# Altium PCB motordriver-v3.1.PcbDoc
Units mil, origin at the board's own origin, x right, y up, seen from the top; angles counter-clockwise.
Board outline 3310 x 2010 mil, 2 copper layers (Top Layer, Bottom Layer); 84 components, 64 nets, 279 pads, 243 vias.
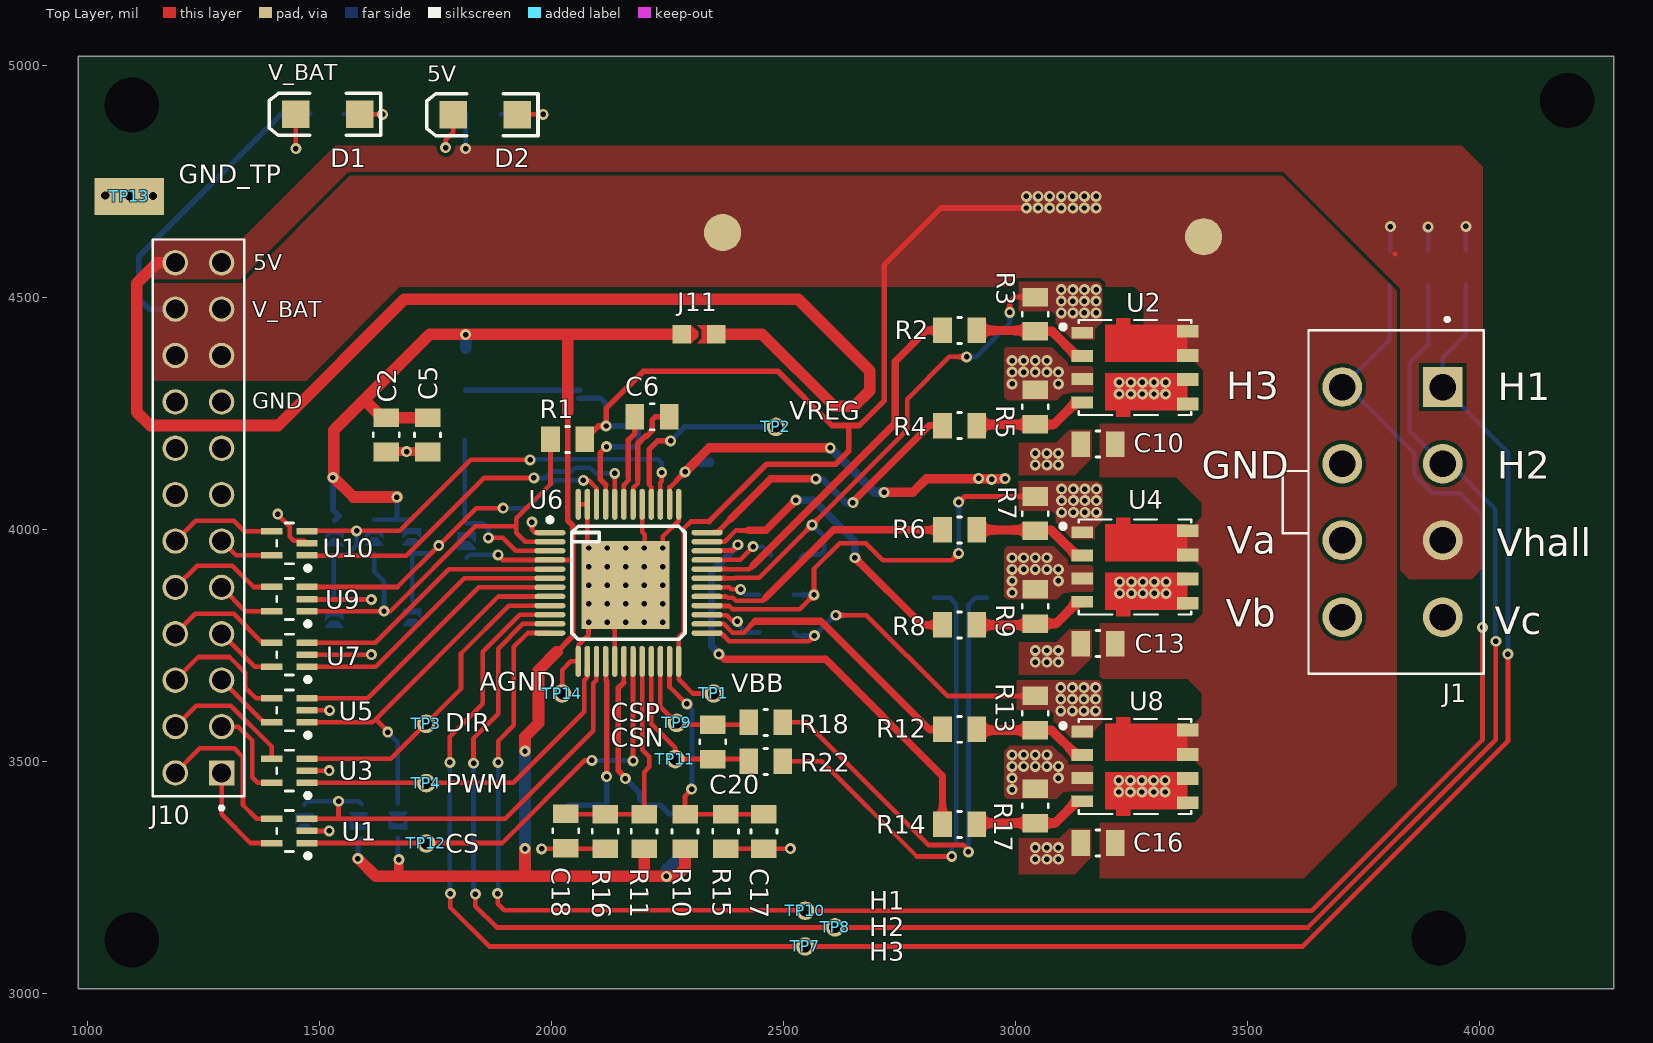
[diagram p0: Top Layer view]
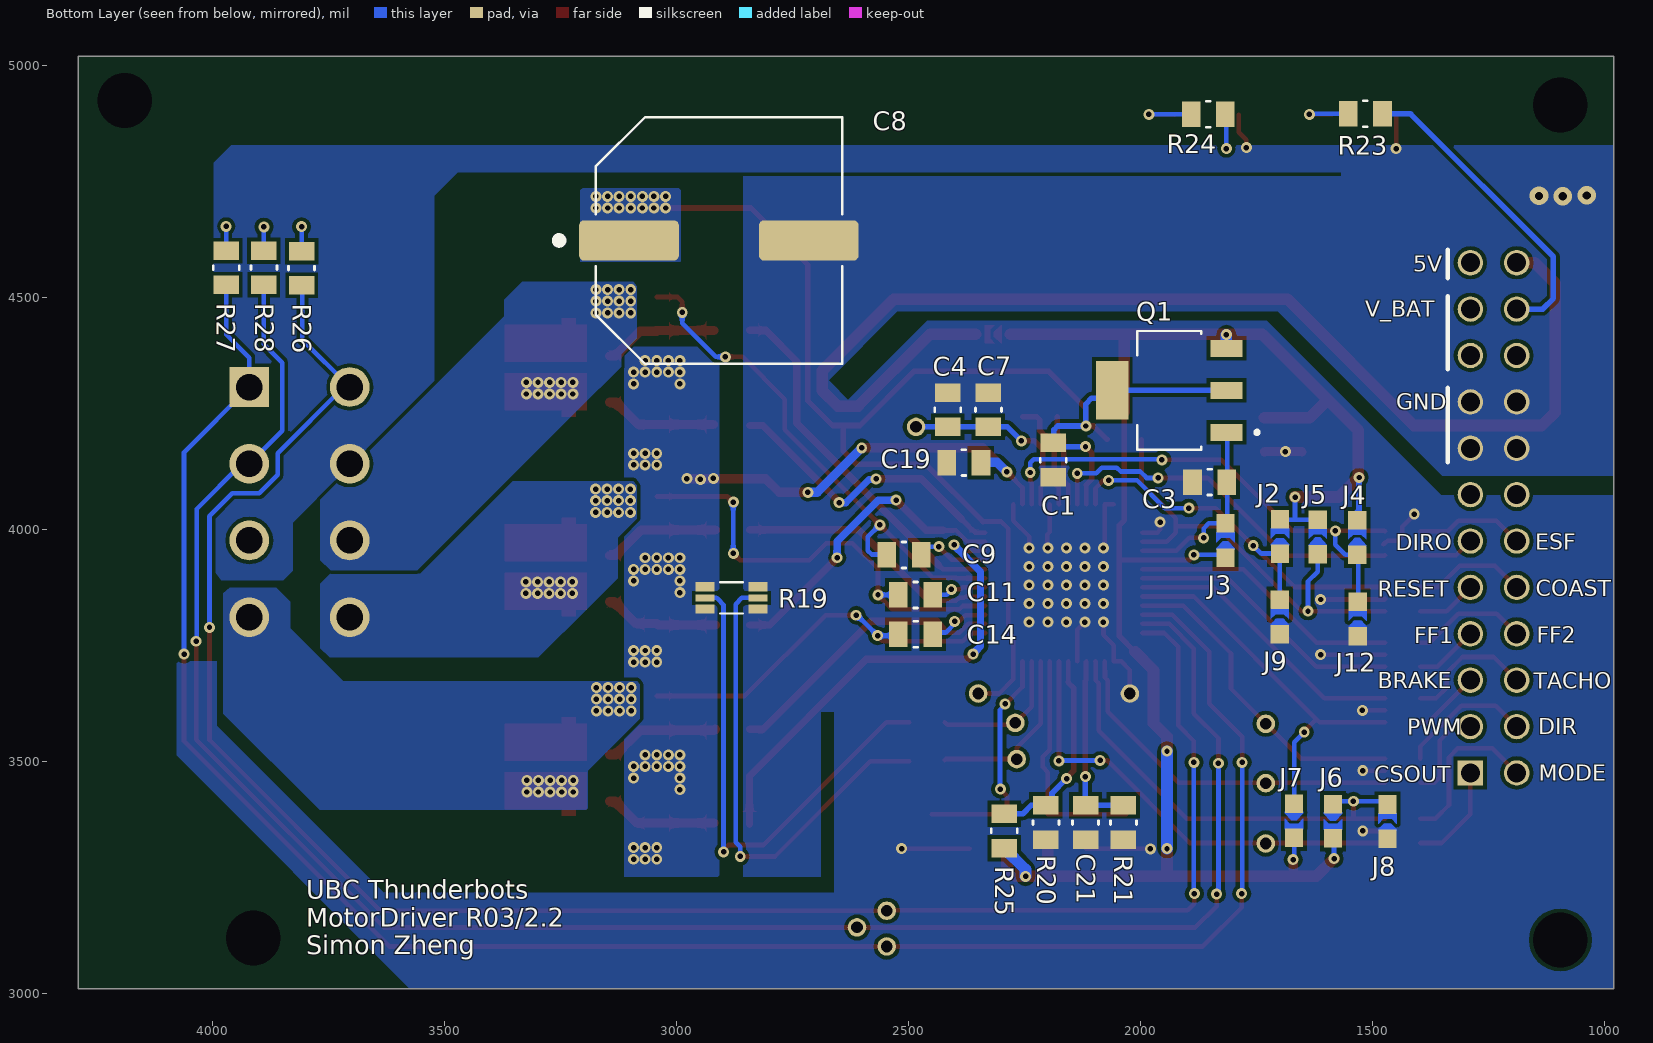
[diagram p1: Bottom Layer view, seen from below]

## Layer stack, top to bottom
Top Solder: solder mask 0.4, Solder Resist, Dk 3.5
Top Layer: signal copper 1.4
Dielectric 1: dielectric 12.6, FR-4, Dk 4.8
Bottom Layer: signal copper 1.4
Bottom Solder: solder mask 0.4, Solder Resist, Dk 3.5

## Board outline
980,5020 4290,5020 4290,3010 980,3010

## Design rules (kind name [scope] priority, off if disabled: settings)
Clearance Clearance_1 [InPolygon] p1: gap=8 ignorepadtopadclearanceinfootprint=FALSE except(0: Arc-Hole Track-Hole SMDPad-Hole THPad-Hole Via-Hole Fill-Hole Poly-Hole Region-Hole Text-Hole)
Clearance [All vs IsTrack] p2: gap=8 ignorepadtopadclearanceinfootprint=FALSE except(0: Arc-Hole Track-Hole SMDPad-Hole THPad-Hole Via-Hole Fill-Hole Poly-Hole Region-Hole Text-Hole)
ComponentClearance ComponentClearance_1 [All] p1: gap=8 collisioncheckmode=3 verticalgap=10 showdistances=FALSE
DiffPairsRouting [All] p1: maxlimit=10 minlimit=10 mostfreqgap=10 substack1={BB42A184-A522-4EB3-BED3-D8B33C0710D8} toplayer_{bb42a184-a522-4eb3-bed3-d8b33c0710d8}_minwidth=15 toplayer_{bb42a184-a522-4eb3-bed3-d8b33c0710d8}_maxwidth=15 toplayer_{bb42a184-a522-4eb3-bed3-d8b33c0710d8}_prefwidth=15 bottomlayer_{bb42a184-a522-4eb3-bed3-d8b33c0710d8}_minwidth=15 bottomlayer_{bb42a184-a522-4eb3-bed3-d8b33c0710d8}_maxwidth=15 bottomlayer_{bb42a184-a522-4eb3-bed3-d8b33c0710d8}_prefwidth=15 toplayer_minwidth=15 toplayer_maxwidth=15 toplayer_prefwidth=15 bottomlayer_minwidth=15 bottomlayer_maxwidth=15 bottomlayer_prefwidth=15 maxuncoupledlength=500
HoleSize [All] p1: absolutevalues=TRUE maxlimit=236.22 minlimit=1 maxpercent=80.000 minpercent=20.000
MinimumSolderMaskSliver [All] p1 off: minsoldermaskwidth=5.51
NetAntennae [All] p1 off: netantennaetolerance=0
PolygonConnect [All] p1: connectstyle=Direct reliefconductorwidth=10 reliefentries=4 polygonreliefangle="90 Angle" airgapwidth=10
RoutingVias [All] p1: holewidth=28 width=50 viastyle="Through Hole" minholewidth=19.68 minwidth=39.37 maxholewidth=157.48 maxwidth=157.48 useviatemplates=TRUE viatemplateguid#1={EF34E48F-3D57-4F04-8E49-5C39DC370AE5} viatemplatename#1=v60h30
SilkToSilkClearance [All] p1 off: silktosilkclearance=10
SilkToSolderMaskClearance [IsPad] p1 off: minsilkscreentomaskgap=3.94 clearancetoexposedcopper=TRUE
SolderMaskExpansion [All] p1: expansion=4 istentingtop=FALSE
Width [All] p1: maxlimit=78.74 minlimit=7.87 preferedwidth=10 substack1={BB42A184-A522-4EB3-BED3-D8B33C0710D8}
23 further rules are at their usual default settings.

## Components (designator, comment, footprint, x,y, rotation, side; value= is the part's Value field where it differs from the comment)
C1 "100nF 50V" 0805 2188,4149.49 r90 bottom
C2 "10uF 50V" 0805 1644,4203.99 r90 top
C3 "100nF 50V" 0805 1851,4102 r180 bottom
C4 "100nF 50V" 0805 2415.56,4258 r90 bottom
C5 "100nF 50V" 0805 1733,4204 r90 top
C6 "470nF 50V" 0805 2217,4243 r180 top
C7 "1uF 50V" 0805 2328.08,4258 r90 bottom
C8 "470uF" CAPAE1350X1400N_EEV-FK1V471Q 2909,4623 r180 bottom
C9 "33nF 50V" 0805 2510,3945 r0 bottom
C10 "100nF 50V" 0805 3178,4184.03 r0 top
C11 "33nF 50V" 0805 2485,3858.85 r0 bottom
C13 "100nF 50V" 0805 3178,3754.03 r0 top
C14 "33nF 50V" 0805 2485,3774.03 r0 bottom
C16 "100nF 50V" 0805 3178,3324.03 r0 top
C17 "1000pF 50V" 0805 2458,3349 r90 top
C18 "1000pF 50V" 0805 2031,3350 r90 top
C19 "100nF 50V" 0805 2381,4144 r180 bottom
C20 "1000pF 50V" 0805 2347.93,3542 r90 top
C21 "1000pF 50V" 0805 2118.66,3368 r90 bottom
D1 "LED2" 3.2X1.6X1.1 1517.9,4895 r180 top
D2 "LED2" 3.2X1.6X1.1 1857,4894 r180 top
J1 "Motor Molex Connector" MOLEX_0039281083 3813,4059.03 r270 top
J2 "Jumper (0805 Compatible)" "Solder Jumper" 1699.38,3985 r90 bottom
J3 "Jumper (0805 Compatible)" "Solder Jumper" 1817,3976 r90 bottom
J4 "Jumper (0805 Compatible)" "Solder Jumper" 1532.68,3982.72 r90 bottom
J5 "Jumper (0805 Compatible)" "Solder Jumper" 1618.1,3984 r90 bottom
J6 "Jumper (0805 Compatible)" "Solder Jumper" 1585.23,3371 r270 bottom
J7 "Jumper (0805 Compatible)" "Solder Jumper" 1669,3372 r270 bottom
J8 "Jumper (0805 Compatible)" "Solder Jumper" 1467.65,3370.03 r90 bottom
J9 "Jumper (0805 Compatible)" "Solder Jumper" 1700,3811 r90 bottom
J10 "CN HDR 24POS 2x12" "CN Header 24 POS (12x2)" 1289,3475 r90 top
J11 "Jumper (0805 Compatible)" "Solder Jumper" 2318,4421 r0 top
J12 "Jumper (0805 Compatible)" "Solder Jumper" 1532,3807 r90 bottom
Q1 "N-BJT BCP54" *SOT230P700X180-4N 1938,4300 r0 bottom
R1 "47k" 0805 2035,4194 r180 top
R2 "JUMPER" 0805 2880,4429.03 r180 top
R3 "495k" 0805 3043,4464.03 r270 top
R4 "JUMPER" 0805 2880,4224.03 r180 top
R5 "495k" 0805 3043,4264.03 r270 top
R6 "JUMPER" 0805 2880,3999.03 r180 top
R7 "495k" 0805 3043,4034.03 r270 top
R8 "JUMPER" 0805 2880,3794.03 r180 top
R9 "495k" 0805 3043,3834.03 r270 top
R10 "100k" 0805 2288,3349 r90 top
R11 "10k" 0805 2199.81,3349 r90 top
R12 "JUMPER" 0805 2880,3569.03 r180 top
R13 "495k" 0805 3043,3604.03 r270 top
R14 "JUMPER" 0805 2880,3364.03 r180 top
R15 "4.7k" 0805 2375.54,3349 r270 top
R16 "JUMPER" 0805 2116,3349 r270 top
R17 "495k" 0805 3043,3404.03 r270 top
R18 "1k" 0805 2462,3584 r180 top
R19 "RES 20m 1W" "1206 - Sense" 2882,3852.36 r180 bottom
R20 "5.1k" 0805 2204,3368 r270 bottom
R21 "47k" 0805 2037,3368 r270 bottom
R22 "1k" 0805 2462,3500 r180 top
R23 "1.96K" 0805 1515.36,4896 r0 bottom
R24 "270" 0805 1854,4895 r0 bottom
R25 "JUMPER" 0805 2294,3350 r90 bottom
R26 "10k" 0805 3808.67,4563.2 r270 bottom
R27 "10k" 0805 3971.22,4564.26 r270 bottom
R28 "10k" 0805 3889.94,4564.26 r270 bottom
TP1 "Test Point (Via)" TP#1 2350,3646.36 r90 top
TP2 "Test Point (Via)" TP#1 2484,4221 r90 top
TP3 "Test Point (Via)" TP#2 1729,3581 r90 top
TP4 "Test Point (Via)" TP#2 1729,3453 r90 top
TP7 "Test Point (Via)" TP#1 2547.12,3101 r90 top
TP8 "Test Point (Via)" TP#1 2611.33,3142 r90 top
TP9 "Test Point (Via)" TP#1 2270,3583 r90 top
TP10 "Test Point (Via)" TP#1 2547.12,3178 r90 top
TP11 "Test Point (Via)" TP#1 2267,3505 r90 top
TP12 "Test Point (Via)" TP#3 1728,3323 r90 top
TP13 "Test Point - 5019" TP380X203 1090,4718 r180 top
TP14 "Test Point (Via)" TP#1 2023,3646.23 r90 top
U1 "EMI" SOT-665 1435,3350 r180 top
U2 "IPG20N06S4-15A" PG-TDSON-8-10 3258,4349.03 r0 top
U3 "EMI" SOT-665 1435,3480 r180 top
U4 "IPG20N06S4-15A" PG-TDSON-8-10 3258,3919.03 r0 top
U5 "EMI" SOT-665 1435,3610 r180 top
U6 "A3931" "48-LQFP-EP (7x7)" 2166,3885 r0 top
U7 "EMI" SOT-665 1435,3730 r180 top
U8 "IPG20N06S4-15A" PG-TDSON-8-10 3258,3489.03 r0 top
U9 "EMI" SOT-665 1435,3850 r180 top
U10 "EMI" SOT-665 1435,3970 r180 top

## Footprints (in the part's own frame and the unit in brackets; to place one, negate y for a bottom-side part, rotate by r counter-clockwise, add the part's x,y. Pads: shape width x height; smd on the part's side, far side on the other; paste and mask are expansions set on the pad)
3.2X1.6X1.1 [mm]
  rect 1.5x1.5 smd: 1(-1.75,0) 2(1.75,0)
  silkscreen extent -2.9,-1.15 3.2,1.15
"48-LQFP-EP (7x7)" [mm]
  oval 1.7x0.3 smd: 1(-4.3,2.75) 2(-4.3,2.25) 3(-4.3,1.75) 4(-4.3,1.25) 5(-4.3,0.75) 6(-4.3,0.25) 7(-4.3,-0.25) 8(-4.3,-0.75) 9(-4.3,-1.25) 10(-4.3,-1.75) 11(-4.3,-2.25) 12(-4.3,-2.75) 25(4.3,-2.75) 26(4.3,-2.25) 27(4.3,-1.75) 28(4.3,-1.25) 29(4.3,-0.75) 30(4.3,-0.25) 31(4.3,0.25) 32(4.3,0.75) 33(4.3,1.25) 34(4.3,1.75) 35(4.3,2.25) 36(4.3,2.75)
  oval 0.3x1.7 smd: 13(-2.75,-4.3) 14(-2.25,-4.3) 15(-1.75,-4.3) 16(-1.25,-4.3) 17(-0.75,-4.3) 18(-0.25,-4.3) 19(0.25,-4.3) 20(0.75,-4.3) 21(1.25,-4.3) 22(1.75,-4.3) 23(2.25,-4.3) 24(2.75,-4.3) 37(2.75,4.3) 38(2.25,4.3) 39(1.75,4.3) 40(1.25,4.3) 41(0.75,4.3) 42(0.25,4.3) 43(-0.25,4.3) 44(-0.75,4.3) 45(-1.25,4.3) 46(-1.75,4.3) 47(-2.25,4.3) 48(-2.75,4.3)
  silkscreen extent -4.42,-3.1 3.1,3.57, body extent -3.5,-3.5 3.5,3.5, height 1.6
0805 [mil]
  rect 40x55 smd: 1(-37,0) 2(37,0)
  silkscreen extent -4,-28 4,28
"1206 - Sense" [mil] "4-Wire Sense Footprint"
  rect 41.34x20 smd: 1(-57,-24) 1(-57,24) 2(57,-24) 2(57,24)
  rect 41.34x15 smd paste+0: 3(-57,0) 4(57,0)
  silkscreen extent -24,-33 24,33
*SOT230P700X180-4N [mm]
  rect 1.76x0.93 smd: 1(-3.125,2.3) 2(-3.125,0) 3(-3.125,-2.3)
  rect 1.76x3.19 smd: 2(3.125,0)
  silkscreen extent -4.9,-3.25 1.75,3.25
CAPAE1350X1400N_EEV-FK1V471Q [mm]
  rrect25% 5.46x2.21 smd: 1(-4.925,0) 2(4.925,0)
  silkscreen extent -8.95,-6.75 6.75,6.75
"CN Header 24 POS (12x2)" [mm] "24 position, dual row, standard 0.1\" (2.54mm) spacing."
  rect 1.39x1.39 hole 1.04: 1(0,0)
  round 1.39 hole 1.04: 2(0,2.54) 3(2.54,0) 4(2.54,2.54) 5(5.08,0) 6(5.08,2.54) 7(7.62,0) 8(7.62,2.54) 9(10.16,0) 10(10.16,2.54) 11(12.7,0) 12(12.7,2.54) 13(15.24,0) 14(15.24,2.54) 15(17.78,0) 16(17.78,2.54) 17(20.32,0) 18(20.32,2.54) 19(22.86,0) 20(22.86,2.54) 21(25.4,0) 22(25.4,2.54) 23(27.94,0) 24(27.94,2.54)
  silkscreen extent -2.02,-1.23 29.21,3.77
MOLEX_0039281083 [mm]
  rect 2.175x2.175 hole 1.45: 1(-6.3,2.75)
  round 2.175 hole 1.45: 2(-2.1,2.75) 3(2.1,2.75) 4(6.3,2.75) 5(-6.3,-2.75) 6(-2.1,-2.75) 7(2.1,-2.75) 8(6.3,-2.75)
  silkscreen extent -10.1,-6 9.4,5
PG-TDSON-8-10 [mm] "Infineon specific mosfet array footprint"
  rect 1.2x0.65 smd: 1(-2.89,1.905) 2(-2.89,0.635) 3(-2.89,-0.635) 4(-2.89,-1.905)
  rect 1.2x0.7 smd: 6(2.89,-1.99) 6(2.89,-0.66) 8(2.89,0.66) 8(2.89,1.99)
  Top Layer region: -1.04,2.1 -0.25,2.1 -0.25,2.7 -1.04,2.7
  Top Layer region: -1.04,-2.7 -0.25,-2.7 -0.25,-2.1 -1.04,-2.1
  Top Layer region: -1.64,-0.32 2.84,-0.32 2.87,-0.32 2.87,-2.33 -1.62,-2.33 -1.64,-2.33 -1.64,-2.31
  Top Layer region: -1.64,2.33 2.84,2.33 2.87,2.33 2.87,0.32 -1.62,0.32 -1.64,0.32 -1.64,0.34
  silkscreen extent -4.04,-2.6 3.08,2.6
"Solder Jumper" [mil] "Solder jumper compatible with 0805 passives"
  rect 40x39.37 smd: 1(-37,0) 2(37,0)
  Top Layer region: -16.54,19.68 -4.01,8.37 -3.99,-8.37 -16.54,-19.68 -19.29,-19.68 -19.29,19.68
  Top Layer region: 18,-19.68 -4.06,-19.68 -4.06,-19.06 6,-9 6,15.35 18,15.35
  Top Layer region: 18,19.68 -4.06,19.68 -4.06,19.06 6,9 6,-15.35 18,-15.35
SOT-665 [mil]
  rect 46x14 smd: 1(-38,26) 2(-38,0) 3(-38,-26) 4(38,-26) 5(38,26)
  silkscreen extent -45,-44 27,59
TP#1 [mil] "Test point (40mil Standard)"
  round 40 hole 25: 1(0,0)
TP#2 [mil] "Test point (40mil Standard)"
  round 40 hole 25: 1(0,-1)
TP#3 [mil] "Test point (40mil Standard)"
  round 40 hole 25: 1(0,-2)
TP380X203 [mm]
  rect 3.8x2.03 smd: 1(0,0)

## Part data
C1 C3 C4 C5 C10 C13 C16 C19: library part "CAP 100nF 50V", "CAP CER 0.1UF 50V X7R 0805"
C2 C7: library part "CAP 10uF 50V", "CAP CER 10UF 50V X7R"
C6: library part "CAP 470nF 50V", "CAP CER 0.1UF 50V X7R 0805"
C8: library part "CAP 470uF 35V SMD", "470µF 35V Aluminum Electrolytic Capacitors Radial, Can - SMD 5000 Hrs @ 105°C"
C9 C11 C14: library part "CAP 33nF 50V", "CAP CER 0.033UF 50V X7R 0805"
C17 C18 C20 C21: library part "CAP 1000pF 50V", "CAP CER 1000PF 50V X7R 0805"
D1 D2: library part "LED GREEN SMD", "Typical RED, GREEN, YELLOW, AMBER GaAs LED"
J1: library part "CN HDR 8POS Motor Molex", "Connector Header Through Hole 8 position 0.165\" (4.20mm)"
J10: "Pin Connector 2X12P MOD2 STIFTLEI 24 POS 0.1\" 2.54mm"
Q1: "TRANS NPN 45V 1A SOT223"
R1 R21: library part "RES 47k 1/8W", "RES SMD 47K OHM 1% 1/8W 0805"
R2 R4 R6 R8 R12 R14 R16 R25: library part "RES 0 1/8W", "RES SMD 0 OHM JUMPER 1/8W 0805"
R3 R5 R7 R9 R13 R17: library part "RES 495k 0805", "RES SMD 499K OHM 1% 1/8W 0805"
R10: library part "RES 100k 1/8W", "RES SMD 100K OHM 1% 1/8W 0805"
R11 R26 R27 R28: library part "RES 10k 1/8W", "RES SMD 10K OHM 1% 1/8W 0805"
R15: library part "RES 4.7k 1/8W", "RES SMD 4.7k OHM 1% 1/8W 0805"
R18 R22: library part "RES 1k 1/8W", "RES SMD 1K OHM 5% 1/8W 0805"
R19: "RES 0.02 OHM 1% 1W 1206"
R20: library part "RES 5.1k 1/8W", "RES SMD 5.1K OHM 1% 1/8W 0805"
R23: library part "RES 1.96k 1/8W", "RES SMD 1.96K OHM 1% 1/8W 0805"
R24: library part "RES 270 1/8W", "RES SMD 270 OHM 5% 1/8W 0805"
TP13: "PC Test Point, Miniature Phosphor Bronze, Silver Plating Surface Mount Mounting Type"
U1 U3 U5 U7 U9 U10: library part "EMI FILTER IP4256CZ5-W", "FILTER RC(PI) 100 OHM/19PF SMD"
U2 U4 U8: "MOSFET N+N 60V 20A"
U6: library part A3931_A1, "IC MOTOR DRIVER 5.5V-50V 48LQFP - Alternative Symbol"

## Free pads (board coordinates)
  round 60 hole 118.11: 2(1095,3115) 2(1095,4915) 2(3913,3119.03) 2(4190,4925)
  round 80 smd paste-80: 3(2369,4640) 3(3406,4631)
  rect 190x190 smd: AGND(2160,3880)

## Via types
v1: diameter 23.62, hole 11.81, Top Layer to Bottom Layer, 240 vias
v2: diameter 40, hole 18, Top Layer to Bottom Layer, 3 vias

## Nets (pads, with @x,y where several pads share a name; then routed paths per layer and width w, separated by ;. In a path a pad name is that pad's centre, name@x,y a point inside that pad or via, vN(x,y) a via of type N, cw(c..) or ccw(c..) an arc to the next point about the centre after c; other vN are vias at no path point)
5V: C2.2 C5.2 J2.2 J3.1 J4.2 J5.2 J6.2 J7.2 J11.1 Q1.3 R10.1 R11.1 R25.1 U6.4 | length 4007.8
  Top Layer w10: v1(1885,3945.26) 1885,3943 1893.79,3934.21 U6.4 2045.21,3934.21 2046,3935 ; 2046,3770 2046,3770.31
  Top Layer w12: 2012,3736 2046,3770 ; 2035,4254 2035,4019.86 2046,4008.86 2046,3935 2046,3770.31
  Top Layer w20: 1669,3252 1671,3254 v1(1671,3288) ; 2034,4421 2035,4420
  Top Layer w25: v1(1529,4112) v1@1531,4112 ; v1(1582.83,3290.48) 1621.3,3252 1669,3252 1934,3252 ; v1(1667,4069.9) 1573.1,4069.9 v1@1531,4112 ; C5.2 C2.2 1635.01,4240.99 1596.5,4279.5 ; v1(1943,3312) 1943,3261 1934,3252 ; v1(1943,3522) 1943,3553 1972,3582 1972,3696.31 2011.69,3736 2012,3736 ; 2035,4254 2035,4420 ; R11.1 2199.81,3253.81 2198,3252 ; J11.1 2034,4421 1738,4421 1596.5,4279.5 ; R10.1 2288,3271 2269,3252 v1(2248,3252) 2198,3252 ; v1@1531,4112 1531,4214 1596.5,4279.5 ; 1934,3252 2198,3252
  Bottom Layer w10: v1(1582.83,3290.48) 1582.83,3325.98 J6.2@1590.85,3334 ; J5.2 1618.2,4021.1 1667,4021.1 ; v1(1667,4069.9) 1667,4021.1 ; J7.2 1669,3290 v1(1671,3288) ; J2.2 1698.47,4021.1 1667,4021.1 ; J3.1 1823.26,3945.26 v1(1885,3945.26)
  Bottom Layer w12: v1(1529,4112) 1529,4042.03 1542,4029.03 J4.2
  Bottom Layer w25: Q1.3 v1(1815,4420) ; v1(1943,3312) v1(1943,3522) ; v1(2248,3252) 2248,3267 R25.1
5V_EXT: J1.3 J10.23 J10.24 J11.2 R24.1 R26.1 R27.1 R28.1 | length 2830.8
  Top Layer w10: 3818,4594.22 3818.67,4593.56
  Top Layer w25: J10.24 1150,4575 1106,4531 1106,4253 1134.97,4224.03 1411.03,4224.03 1683,4496 2532,4496 2686,4342 2686,4299 2653,4266 2609,4266 2454,4421 J11.2
  Bottom Layer w10: v1(1815,4821) 1815,4893 R24.1 ; R26.1 v1(3808.67,4652.65) ; R28.1 v1(3889.94,4652.26) ; R27.1 v1(3971.22,4653.32)
BRAKE: J7.1 U5.1 U6.8 | length 838
  Top Layer w10: U5.1 1614,3584 1620.98,3590.98 ; v1(1647.14,3562.86) 1647.14,3564.83 1620.98,3590.98 ; U6.8 1885.47,3855.47 1620.98,3590.98
  Bottom Layer w10: v1(1647.14,3562.86) 1669,3541 J7.1
COAST: J2.1 J9.2 U6.46 U9.3 | length 926
  Top Layer w10: U9.3 1668,3876 v1(1757,3965) 1838,4046 v1(1896,4046) ; v1(2069,4106) 2080,4106 2097.1,4088.9 U6.46
  Bottom Layer w10: J9.2 1700,3947.38 J2.1 1740,3948 v1(1757,3965) ; v1(1896,4046) 1947.73,4046 2007.73,4106 v1(2069,4106)
CSOUT: TP12.1 U1.1 U6.19 | length 992
  Top Layer w10: U1.1 1894,3324 2072,3502 v1(2087,3502) ; U6.19 2175.84,3627.16 2175.93,3627.25 v1(2175.93,3501)
  Bottom Layer w10: v1(2087,3502) 2174.93,3502 v1(2175.93,3501)
DIR: TP3.1 U3.3 U6.9 | length 704.6
  Top Layer w10: U3.3 1654,3506 1805,3657 1805,3732.53 1908.26,3835.79 U6.9
DIRO: U6.44 U10.1 | length 814.1
  Top Layer w10: U10.1 1473.81,3943.19 1687.19,3943.19 1855,4111 v1(1962,4111) ; U6.44 v1(2136.47,4121)
  Bottom Layer w10: v1(1962,4111) 1987.09,4111 2001.09,4125 2043,4125 2051,4133 2083.69,4133 2095.69,4121 v1(2136.47,4121)
ESF: J4.1 J12.2 U6.39 U10.3 | length 1109.3
  Top Layer w10: U10.3 1474,3997 v1(1580,3997) 1673,3997 1826,4150 v1(1954,4150) ; U6.39 2234.9,4100.9 2238,4104 2238,4122.54 v1(2237.77,4122.77)
  Bottom Layer w10: J12.2@1530.52,3847 1530.52,3943.55 J4.1 1558.72,3945.72 1580,3967 v1(1580,3997) ; v1(1954,4150) 1955.59,4151.59 2230.3,4151.59 2237.77,4144.13 v1(2237.77,4122.77)
FF1: U6.6 U7.1 | length 602.8
  Top Layer w10: U7.1 1621.09,3704 1811.93,3894.84 U6.6
FF2: U6.5 U7.3 | length 589.4
  Top Layer w10: U7.3 1620,3756 1778.53,3914.53 U6.5
GND: C1.1 C2.1 C3.1 C4.2 C5.1 C7.2 C8.2 C17.1 C18.1 C19.1 C21.1 D1.2 D2.2 J1.6 J8.1 J9.1 J10.15 J10.16 J10.17 J10.18 J12.1 pad.AGND R15.2 R16.2 R19.2 R20.2 R21.2 TP13.1 TP14.1 U1.2 U3.2 U5.2 U6.1 U6.13 U6.17 U6.37 U6.41 U6.47 U6.48 U7.2 U9.2 U10.2 | length 1707.2
  Top Layer w10: v1(1410,4033) 1410,4031.38 1436,4005.38 1436,3984.62 1444.62,3976 1467,3976 U10.2 1474,3971 U10.2@1477,3968 ; v1(1449,4821) D1.2 ; U1.2 v1(1521,3350) ; U3.2 v1(1521,3480) ; U5.2 v1(1522,3610) ; U7.2 v1(1612,3730) ; U9.2 1474,3849 v1(1612,3849) ; v1(1772,4823) 1772,4840 1788.1,4856.1 D2.2 ; v1(1958,4016) 1958,3999 1963.73,3993.27 U6.1 ; v1(1979,3311.21) 1979.79,3312 R16.2 R16.2@2117.48,3312 ; TP14.1@2014,3650 2023,3659 2023,3697 2041.71,3715.71 U6.13 2057.73,3750.73 2080,3773 v1(2080,3800) ; U6.48 U6.47 2077.42,3962.58 v1(2080,3960) ; v1(2120,3800) 2136.47,3783.53 U6.17 ; U6.41 2195.53,3994.47 2201,3989 2201,3961 v1(2200,3960) ; v1(2240,3960) 2240,3984.73 2274.27,4019 U6.37 ; R15.2@2367.97,3312 R15.2 C17.1 v1(2515,3312)
  Top Layer w20: C2.1@1651.85,4166.99 1652.86,4168 v1(1688,4168) 1731.97,4168 C5.1
  other v1: 2160,3800 2200,3800 2240,3800 2080,3840 2120,3840 2160,3840 2200,3840 2240,3840 2080,3880 2120,3880 2160,3880 2200,3880 2240,3880 2080,3920 2120,3920 2160,3920 2200,3920 2240,3920 2120,3960 2160,3960
  other v2: 1090,4718 1141,4719 1038,4720
H1: J1.1 R27.2 TP7.1 U6.10 | length 4320.5
  Top Layer w10: v1(1781,3498) 1781,3553 1852,3624 1852,3736 1932.1,3816.1 U6.10 ; v1(1782,3215) 1782,3185 1866,3101 TP7.1 3619.97,3101 4062,3543.03 v1(4062,3731)
  Bottom Layer w10: v1@1781,3498.69 v1(1781,3498) 1781,3216 v1(1782,3215) ; R27.2 3971.22,4420.22 3921.27,4370.27 J1.1 4062,4166.33 v1(4062,3731)
H2: J1.2 R28.2 TP8.1 U6.11 | length 4182.3
  Top Layer w10: v1(1832,3496) 1832,3550 1885,3603 1885,3743 1938.42,3796.42 U6.11 ; v1(1836,3214) 1836,3188 1882,3142 TP8.1 3631,3142 4036,3547 v1(4036,3759)
  Bottom Layer w10: v1(1832,3496) 1832,3218 v1(1836,3214) ; R28.2 3889.94,4398.94 3850.2,4359.2 3850.2,4212.78 J1.2 3937.32,4141.7 4035,4044.03 4035,3760 v1(4036,3759)
H3: J1.5 R26.2 TP10.1 U6.12 | length 4146
  Top Layer w10: v1(1884,3215) 1884,3193 1898,3179 2541,3179 2547,3185 2554,3178 3638.97,3178 4007.19,3546.22 v1(4007.19,3789) ; v1(1885,3498) 1885,3544 1919,3578 1919,3747 1948.73,3776.73 U6.12
  Bottom Layer w10: v1(1885,3498) v1@1885,3220 ; v1@1889,3218 1886,3221 v1@1885,3220 ; R26.2@3807,4526 3807,4409.33 J1.5 3717.35,4307.06 3860,4164.41 3860,4118.03 3900,4078.03 3958,4078.03 4008,4028.03 4007.19,4027.22 v1(4007.19,3789) ; v1@1885,3220 1885,3216 v1(1884,3215) 1884,3219 v1@1885,3220
MODE: J6.1 J8.2 U1.3 U6.15 | length 1014.9
  Top Layer w10: U1.3 1541,3376 ; v1(1541,3414) 1541,3376 ; U6.15 2096.32,3714.93 2096.32,3674.32 2090,3668 2090,3566 1900,3376 1541,3376
  Bottom Layer w10: J8.2 1474.62,3414 v1(1541,3414) 1584.85,3414 J6.1@1590.85,3408
NetC3_2: C3.2 J3.2 Q1.1 U6.3 | length 397
  Top Layer w10: v1(1864,3982) 1895,3982 1923.1,3953.9 U6.3
  Bottom Layer w10: Q1.1@1812.97,4192.45 1812.97,4017.03 J3.2 1853,4013 1864,4002 v1(1864,3982)
NetC4_1: C4.1 C7.1 TP2.1 U6.40 | length 413.3
  Top Layer w10: 2211,4100 2211,4095.79 2215.21,4091.57 U6.40
  Top Layer w12: 2211,4100 2211,4173 2229,4191 v1(2257,4191)
  Bottom Layer w12: v1(2257,4191) 2287,4221 C7.1 TP2.1
NetC6_1: C6.1 U6.42 | length 240.4
  Top Layer w10: U6.42 2176.62,4055.07 2176.62,4089.68 2186,4099.06 2186,4106.46
  Top Layer w12: 2186,4106.46 2186,4184.66 2202.84,4201.5 2205.8,4201.5 2217,4212.7 2217,4236 2224,4243 C6.1
NetC6_2: C6.2 U6.43 | length 198.8
  Top Layer w10: U6.43 2156.16,4096.51 2156.51,4096.51 2166,4106 2166,4115
  Top Layer w12: 2166,4115 2166,4192.95 2180,4206.95 C6.2
NetC9_1: C9.1 U6.33 | length 157.1
  Top Layer w10: U6.33 2336.07,3934.99 2406.99,3934.99 v1(2435,3963)
  Bottom Layer w10: v1(2435,3963) 2455,3963 C9.1
NetC10_1: C10.1 C13.1 C16.1 C19.2 R5.1 R9.1 R17.1 R19.1 U2.3 U4.3 U6.38 U8.3 | length 909.2
  Top Layer w10: U6.38 2254.58,4090.29 v1(2288.3,4124)
  Top Layer w20: v1(2288.3,4124) 2340.3,4176 v1(2601,4176) ; v1(2717,4080) 2779,4080 2808.36,4109.36 v1(2978,4109.36)
  Bottom Layer w20: v1(2288.3,4124) 2309.3,4145 C19.2@2342,4145 ; v1(2601,4176) 2697,4080 v1(2717,4080)
  other v1: 3043,3289.03 3068,3289.03 3093,3289.03 3043,3314.03 3068,3314.03 3093,3314.03 2993,3439.03 2993,3464.03 3093,3464.03 2993,3489.03 3018,3489.03 3043,3489.03 3068,3489.03 3093,3489.03 2993,3514.03 3018,3514.03 3043,3514.03 3068,3514.03 3043,3714.03 3068,3714.03 3093,3714.03 3043,3739.03 3068,3739.03 3093,3739.03 2993,3864.03 2993,3889.03 3093,3889.03 2993,3914.03 3018,3914.03 3043,3914.03 3068,3914.03 3093,3914.03 2993,3939.03 3018,3939.03 3043,3939.03 3068,3939.03 2949,4108 2921,4110 3043,4139.03 3068,4139.03 3093,4139.03 3043,4164.03 3068,4164.03 3093,4164.03 2993,4314.03 3093,4314.03 2993,4339.03 3018,4339.03 3043,4339.03 3068,4339.03 3093,4339.03 2993,4364.03 3018,4364.03 3043,4364.03 3068,4364.03
NetC11_1: C11.1 U6.30 | length 123.5
  Top Layer w10: U6.30 2383.87,3875.16 2388,3871.03 v1(2408,3871.03)
  Bottom Layer w10: v1(2408,3871.03) 2405.97,3871.03 2418.15,3858.85 C11.1
NetC14_1: C14.1 U6.27 | length 133.2
  Top Layer w10: U6.27 2336.07,3815.32 2377.7,3815.32 2391.03,3802 v1(2401,3802)
  Bottom Layer w10: v1(2401,3802) 2401,3801 2399,3799 2420.3,3777.7 C14.1@2448,3777.7
NetC17_2: C17.2 R10.2 R15.1 U6.23 | length 521.7
  Top Layer w10: U6.23 2254.58,3660.42 2291,3624 v1(2292,3624) ; v1(2302,3440) 2288,3426 R10.2 R15.1 C17.2@2450.3,3386
  Bottom Layer w10: v1(2292,3624) 2290,3624 2303,3611 2303,3441 v1(2302,3440)
NetC18_2: C18.2 R11.2 R16.1 U6.20 | length 509.6
  Top Layer w10: C18.2@2031,3386 R16.1 R11.2 2199.81,3476.81 2211,3488 2211,3510.03 2195.53,3525.5 U6.20
NetC20_1: C20.1 R22.2 TP11.1 U6.21 | length 388
  Top Layer w10: U6.21 2215.21,3580.79 2267,3529 TP11.1 C20.1 2420,3505 R22.2@2422,3503
NetC20_2: C20.2 R18.2 TP9.1 U6.22 | length 303.4
  Top Layer w10: U6.22 2234.9,3618.1 TP9.1 ; TP9.1@2268,3579 C20.2 2416.85,3579 R18.2@2422,3584.15
NetC21_2: C21.2 R21.1 U6.16 | length 398
  Top Layer w10: U6.16 2117.57,3714.93 2117.57,3674.38 2119,3672.94
  Top Layer w12: v1@2116.79,3463.21 v1(2119,3466.94) 2119,3672.94
  Bottom Layer w12: R21.1 C21.2 2119,3405 v1(2119,3466.94)
NetD1_1: D1.1 R23.2 | length 133.3
  Top Layer w10: D1.1 v1(1636,4895)
  Bottom Layer w10: R23.2 1635,4896 v1(1636,4895)
NetD2_1: D2.1 R24.2 | length 147.5
  Top Layer w10: D2.1 1926.9,4895 v1(1982,4895)
  Bottom Layer w10: R24.2 v1(1982,4895)
NetJ10_1: J10.1 U1.5 | length 222.7
  Top Layer w10: J10.1 1289,3386 1351,3324 U1.5
NetJ10_2: J10.2 U1.4 | length 353.2
  Top Layer w10: J10.2 1242,3528 1316,3528 1335,3509 1335,3406 1365,3376 U1.4
NetJ10_3: J10.3 U3.5 | length 204.4
  Top Layer w10: J10.3 1325,3575 1355,3545 1355,3466 1367,3454 U3.5
NetJ10_4: J10.4 U3.4 | length 289.1
  Top Layer w10: J10.4 1234,3620 1309,3620 1397,3532 U3.4
NetJ10_5: J10.5 U5.5 | length 145.7
  Top Layer w10: J10.5 1380,3584 U5.5
NetJ10_6: J10.6 U5.4 | length 284.3
  Top Layer w10: J10.6 1239,3725 1306,3725 1340,3691 1340,3659 1363,3636 U5.4
NetJ10_7: J10.7 U7.5 | length 137.4
  Top Layer w10: J10.7 1360,3704 U7.5
NetJ10_8: J10.8 U7.4 | length 251.5
  Top Layer w10: J10.8 1232,3818 1315,3818 1377,3756 U7.4
NetJ10_9: J10.9 U9.5 | length 129.1
  Top Layer w10: J10.9 1340,3824 U9.5
NetJ10_10: J10.10 U9.4 | length 246.5
  Top Layer w10: J10.10 1236,3922 1312,3922 1358,3876 U9.4
NetJ10_11: J10.11 U10.5 | length 120.8
  Top Layer w10: J10.11 1320,3944 U10.5
NetJ10_12: J10.12 U10.4 | length 235.8
  Top Layer w10: J10.12 1233,4019 1315,4019 1338,3996 U10.4
NetR2_1: R2.1 R3.2 U2.2 | length 248.2
  Top Layer w20: R2.1@2920,4429.03 R3.2@3045,4429.03 ; R3.2 3078.97,4427.03 3131.97,4374.03 U2.2
NetR2_2: R2.2 U6.32 | length 798.8
  Top Layer w10: U6.32 2426.65,3914.53 2436.13,3924
  Top Layer w16: 2436.13,3924 2741,4228.87 2741,4362 2808.03,4429.03 R2.2
NetR4_1: R4.1 R5.2 U2.4 | length 243.1
  Top Layer w20: R4.1@2921,4226.03 3083,4226.03 3131,4274.03 U2.4
NetR4_2: R4.2 U6.36 | length 646.3
  Top Layer w10: U6.36 2356.81,3993.27 2386.54,4023
  Top Layer w16: 2386.54,4023 2472.54,4109 v1(2570,4109) ; v1(2650,4058) 2650,4059.37 2814.66,4224.03 R4.2
  Bottom Layer w16: v1(2570,4109) 2571.32,4107.68 2585.32,4107.68 2635,4058 v1(2650,4058)
NetR6_1: R6.1 R7.2 U4.2 | length 250
  Top Layer w20: R6.1 3076.97,3999.03 3131.97,3944.03 U4.2
NetR6_2: R6.2 U6.29 | length 575
  Top Layer w10: U6.29 2335.48,3855.28 2378.29,3855.28 2380.54,3853.03 2390.91,3853.03 2397.86,3846.08 2455.08,3846.08 2462.59,3853.59
  Top Layer w16: 2462.59,3853.59 2608.03,3999.03 R6.2
NetR8_1: R8.1 R9.2 U4.4 | length 247.9
  Top Layer w20: R8.1 3040,3794.03 R9.2 3088,3797.03 3135,3844.03 U4.4
NetR8_2: R8.2 U6.35 | length 676.9
  Top Layer w10: U6.35 2373.49,3973.58 2397.85,3997.94 2424.94,3997.94
  Top Layer w16: 2424.94,3997.94 2461.94,3997.94 v1(2527,4063) ; v1(2654,3939) 2798.97,3794.03 R8.2
  Bottom Layer w16: v1(2527,4063) 2565.49,4063 2654,3974.49 v1(2654,3939)
NetR12_1: R12.1 R13.2 U8.2 | length 250
  Top Layer w20: R12.1 2919,3567.03 R13.2 3078.15,3567.03 3131.15,3514.03 U8.2
NetR12_2: R12.2 U6.26 | length 622.5
  Top Layer w10: U6.26 2371.15,3796.42 2390.38,3777.19 2414.19,3777.19 2439,3802
  Top Layer w16: 2439,3802 2581,3802 2813.97,3569.03 R12.2
NetR14_1: R14.1 R17.2 U8.4 | length 243.7
  Top Layer w20: R14.1@2920,3367.03 R17.2 3086,3367.03 3133,3414.03 U8.4
NetR14_2: R14.2 U6.34 | length 1034.4
  Top Layer w10: U6.34 2335.98,3954.58 2390.58,3954.58 2402,3966 v1(2402,3967)
  Top Layer w16: v1(2360.95,3731) 2361.48,3731.55 2373.03,3720 2591,3720 2843,3468 R14.2
  Bottom Layer w16: v1(2360.95,3731) 2360.95,3732.08 2345,3748.03 2345,3909 2402,3966 v1(2402,3967)
NetR18_1: R18.1 R19.3 | length 1096.5
  Top Layer w10: R18.1 2548,3584 2812.19,3319.81 2888.19,3319.81 2899,3309 v1(2899,3305)
  Bottom Layer w10: v1(2899,3305) 2899,3837 2905.33,3843.33 2905.33,3843.75 2912.95,3851.36 2913.36,3851.36 2914.36,3852.36 R19.3
NetR19_4: R19.4 R22.1 | length 1050.6
  Top Layer w10: R22.1 2583,3500 2788,3295 v1(2863,3295)
  Bottom Layer w10: R19.4 2859.64,3852.36 2873,3839 2873,3326.09 2863,3316.09 v1(2863,3295)
NetR20_1: R20.1 R25.2 U6.18 | length 441.6
  Top Layer w10: 2156.16,3670.16 U6.18
  Top Layer w12: 2156.16,3670.16 2144,3658 2144,3480 2161,3463 v1(2159.23,3463)
  Bottom Layer w12: v1(2159.23,3463) 2190.85,3431.38 2190.85,3418.15 R20.1 2236,3405 2254,3387 R25.2 ; v1@2162.94,3463 v1@2164,3463
PWM: TP4.1 U3.1 U6.14 | length 772.7
  Top Layer w10: U3.1 1918,3454 2071,3607 2071,3674.68 2076.64,3680.32 2076.64,3696.64 2077.42,3697.42 U6.14
RESET: J5.1 R1.2 U6.2 U9.1 | length 970.9
  Top Layer w10: U9.1 v1(1639,3824) 1653,3824 1836,4007 1924,4007 ; U6.2 1943.42,3973.58 1924,3993 1924,4007 ; R1.2 1998,4098 1924,4024 1924,4007
  Bottom Layer w10: J5.1 1618.1,3908.95 1639,3888.05 v1(1639,3824)
SA: C9.2 J1.7 R3.1 U2.1 U2.6 U6.31 | length 1147.2
  Top Layer w10: U6.31 2396.73,3894.84 2397.72,3895.84 2447.84,3895.84 v1(2562,4010) 2767,4215 2767,4281 2858.03,4372.03 v1(2895,4372.03) ; v1(2988,4468.03) 2988,4491.03 2998,4501.03 R3.1
  Bottom Layer w10: C9.2@2538,3940 2544,3946 2579.87,3946 2588,3954.13 2588,3984 v1(2562,4010) ; v1(2895,4372.03) 2915.44,4372.03 2988,4444.59 v1(2988,4468.03)
  other v1: 3224,4292 3249,4292 3274,4292 3299,4292 3324,4292 3224,4317 3249,4317 3274,4317 3299,4317 3324,4317 3099,4467 3124,4467 3149,4467 3174,4467 3099,4492 3124,4492 3149,4492 3174,4492 3099,4517 3124,4517 3149,4517 3174,4517
SB: C11.2 J1.8 R7.1 U4.1 U4.6 U6.28 | length 983.2
  Top Layer w10: U6.28 2336.05,3835.03 2383.46,3835.03 2390.4,3828.08 2535.08,3828.08 v1(2566,3859) 2566,3914.92 2621.08,3970 2678,3970 2714.21,3933.79 2863.56,3933.79 v1(2878,3948.23) ; v1(2878,4059) 2879,4059 2891.03,4071.03 R7.1
  Bottom Layer w10: C11.2 2565.85,3858.85 v1(2566,3859) ; v1(2878,3948.23) v1(2878,4059)
  other v1: 3225,3862 3250,3862 3275,3862 3300,3862 3325,3862 3225,3887 3250,3887 3275,3887 3300,3887 3325,3887 3100,4037 3125,4037 3150,4037 3175,4037 3100,4062 3125,4062 3150,4062 3175,4062 3100,4087 3125,4087 3150,4087 3175,4087
SC: C14.2 J1.4 R13.1 U6.25 U8.1 U8.6 | length 858.9
  Top Layer w10: U6.25 2365.38,3776.73 2383.12,3759 2555,3759 v1(2567,3771) ; v1(2613,3815) 2679,3815 2852.97,3641.03 R13.1
  Bottom Layer w10: C14.2@2522,3777.7 2528.7,3771 v1(2567,3771) 2612,3816 v1(2613,3815)
  other v1: 3223,3434 3248,3434 3273,3434 3298,3434 3323,3434 3223,3459 3248,3459 3273,3459 3298,3459 3323,3459 3098,3609 3123,3609 3148,3609 3173,3609 3098,3634 3123,3634 3148,3634 3173,3634 3098,3659 3123,3659 3148,3659 3173,3659
TACHO: U5.3 U6.7 | length 622.8
  Top Layer w10: U5.3 1604,3636 1843.16,3875.16 U6.7
VCC: C1.2 C8.1 C10.2 C13.2 C16.2 J10.19 J10.20 J10.21 J10.22 pad.3 Q1.2 R1.1 R23.1 TP1.1 U2.8 U4.8 U6.24 U6.45 U8.8 | length 3686.5
  Top Layer w10: U6.45 2116.79,4096.67 ; 2340,4017 2300,4017 2285,4002 2285,3778 2274.27,3767.27 U6.24 2274.27,3676.73 2304.64,3646.36 2334.18,3646.36 TP1.1@2343.82,3656
  Top Layer w12: R1.1 2101,4223 v1(2118,4223) 2118,4261 2198,4341 2488,4341 2604.97,4224.03 2642,4224.03 ; 2116.79,4096.67 2105,4108.46 2105,4165 v1(2118.66,4178.66) ; 2340,4017 2463.64,4140.64 2612.64,4140.64 2641,4169 2641,4223.03 2642,4224.03 ; v1(3024,4693) 2840,4693 2717,4570 2717,4277.03 2664,4224.03 2642,4224.03
  Bottom Layer w12: J10.22 1133,4475 1110,4498 1110,4587.96 1418.04,4896 R23.1 ; Q1.2@1814.97,4300 Q1.2@2061.03,4300 ; Q1.2@2059.03,4283 2105.33,4283 2118,4270.33 v1(2118,4223) 2178.66,4223 2187,4214.66 2187,4187.49 C1.2 2180.17,4178.66 v1(2118.66,4178.66)
  other v1: 3049,4693 3074,4693 3099,4693 3124,4693 3149,4693 3174,4693 3024,4718 3049,4718 3074,4718 3099,4718 3124,4718 3149,4718 3174,4718
pads on no net: J10.13 J10.14

## Polygon pours and split planes (outlines as drawn)
SA on Top Layer "SA_L01_P006" (solid, pour order 6): 3139.22,4409.03 3171.61,4409.03 3171.61,4431.64 3187,4447.03 3187,4528.03 3181,4534.03 3007,4534.03 3007,4470.03 3078.24,4470.03 3087,4461.26 3087,4440.03 3118,4409.03
NetC10_1 on Top Layer "NETC10_1_L01_P011" (solid, pour order 11): 3165,4352.03 3168,4349.03 3168,4297.25 3163.73,4293.03 3103.99,4293.03 3096,4285.03 3089,4278.03 2986,4278.03 2983,4278.03 2976,4285.03 2976,4388.03 2981,4393.03 3066,4393.03 3079,4393.03 3120,4352.03
SB on Top Layer "SB_L01_P013" (solid, pour order 13): 3139.22,3979.03 3171.61,3979.03 3171.61,4002.63 3188,4019.03 3188,4095.03 3179,4104.03 3007,4104.03 3007,4040.03 3078.24,4040.03 3087,4031.26 3087,4010.03 3118,3979.03
NetC10_1 on Top Layer "NETC10_1_L01_P015" (solid, pour order 15): 3165,3923.03 3168,3920.03 3168,3868.25 3163.73,3864.03 3103.99,3864.03 3096,3856.03 3089,3849.03 2986,3849.03 2983,3849.03 2976,3856.03 2976,3957.03 2983,3964.03 3083,3964.03 3124,3923.03
NetC10_1 on Top Layer "NETC10_1_L01_P019" (solid, pour order 19): 3165,3493.03 3168,3490.03 3168,3438.25 3163.73,3434.03 3103.99,3434.03 3096,3426.03 3089,3419.03 2986,3419.03 2983,3419.03 2976,3426.03 2976,3522.03 2988,3534.03 3066,3534.03 3079.47,3534.03 3120.47,3493.03
SC on Top Layer "SC_L01_P021" (solid, pour order 21): 3135.22,3550.03 3167.61,3550.03 3167.61,3564.03 3187,3583.42 3187,3668.03 3180,3675.03 3003,3675.03 3003,3611.03 3074.24,3611.03 3083,3602.26 3083,3581.03 3114,3550.03
VCC on Top Layer "VCC_L01_P031" (solid, pour order 31): 3256,4523 1673,4523 1471,4321 1139,4321 1139,4531 1334,4531 1565,4762 3575,4762 3822,4515 3822,3448 3622,3248 3182,3248 3182,3368 3386,3368 3404,3386 3404,3484 3380,3508 3357,3508 3357,3573 3377,3573 3402,3598 3402,3603 3402,3647 3371,3678 3182,3678 3182,3798 3384,3798 3404,3818 3404,3915 3386,3933 3347,3933 3347,4007.1 3382.1,4007.1 3402,4027 3402,4058 3347,4113 3182,4113 3182,4228 3382,4228 3405,4251 3405,4343.23 3380.23,4368 3277,4368 3277,4502
5V_EXT on Top Layer "5V_EXT_L01_P033" (solid, pour order 33): 3579,4769 1565.5,4769 1334.75,4538.25 1139,4538.25 1139,4628.25 1334.75,4628.25 1534,4827.5 3797.5,4827.5 3962.5,4827.5 4008,4782 4008,3917 3984,3893 3849,3893 3827,3915 3827,4521
NetC10_1 on Top Layer "NETC10_1_L01_P043" (solid, pour order 43): 3163.73,3355.03 3116,3355.03 3095,3334.03 3007,3334.03 3007,3257.03 3127.73,3257.03 3163.73,3293.03
NetC10_1 on Top Layer "NETC10_1_L01_P045" (solid, pour order 45): 3164.26,3785.03 3116.53,3785.03 3088.53,3757.03 3007.53,3757.03 3007.53,3687.03 3128.26,3687.03 3164.26,3723.03
NetC10_1 on Top Layer "NETC10_1_L01_P047" (solid, pour order 47): 3164.26,4215.03 3116.53,4215.03 3088.53,4187.03 3007.53,4187.03 3007.53,4117.03 3128.26,4117.03 3164.26,4153.03
SA on Bottom Layer "SA_L02_P009" (solid, pour order 9): 3093.4,4534.03 3328,4534.03 3333,4534.03 3372,4495.03 3372,4259.03 3370,4257.03 3213.97,4257.03 3120,4351 3120,4378 3086,4412 3086,4524.78
SB on Bottom Layer "SB_L02_P017" (solid, pour order 17): 3093.4,4104.03 3328,4104.03 3372,4060.03 3372,3829.03 3370,3827.03 3195,3827.03 3127,3895.03 3127,3982.03 3086,4023.03 3086,4094.78
SC on Bottom Layer "SC_L02_P023" (solid, pour order 23): 3085.21,3673.03 3328,3673.03 3333,3673.03 3372,3634.03 3372,3398.03 3370,3396.03 3195,3396.03 3192,3399.03 3192,3480.03 3121,3551.03 3079.61,3592.42 3079.61,3666.02
SA on Bottom Layer "SA_L02_P025" (solid, pour order 25): 3768,4064.03 3768,3934.03 3746,3912.03 3685,3912.03 3559.07,3912.03 3478,3993.09 3214.07,4257.03 3192,4279.09 3192,4489.03 3343,4489.03
SB on Bottom Layer "SB_L02_P027" (solid, pour order 27): 3747,3904.03 3768,3883.03 3768,3744.03 3748,3724.03 3297.99,3724.03 3192,3830.03 3192,4104.03 3353,4104.03 3553,3904.03
SC on Bottom Layer "SC_L02_P029" (solid, pour order 29): 3963,3874.03 3863.19,3874.03 3833,3843.83 3833,3787.03 3719,3673.03 3333,3673.03 3333,3396.03 3770,3396.03 3977,3603.02 3977.04,3862.33
NetC10_1 on Bottom Layer "NETC10_1_L02_P035" (solid, pour order 35): 2944,4394.03 3093,4394.03 3113,4374.03 3113,3251.03 2908,3251.03 2908,3284.03 2908,3338.03 2908,4358.03
GND on Bottom Layer "GND_L02_P037" (solid, pour order 37): 2856,4761 2856,3295 2856,3261 2856,3251 2689,3251 2689,4246.91 2626.8,4246.91 2626.8,4275.63 2672.58,4321.42 2524,4470 1704,4470 1350,4116 980,4116 980,4761
GND on Bottom Layer "GND_L02_P041" (solid, pour order 41): 2626.8,4278 2786.8,4278 2786.8,3607.13 2626.8,3607.13
GND on Bottom Layer "GND_L02_P049" (solid, remove dead copper, pour order 49): 980,4828 3344,4828 3960,4828 3998,4790 3998,3911.39 3982,3890.69 3848.69,3890.69 3828,3911.39 3828,4014 3523,4319 3523,4719 3471.52,4770.48 1567,4769 1567,4723 1567,4673 1471,4673 1142,4673 980,4673
GND on Bottom Layer "GND_L02_P053" (solid, pour order 53): 2611.33,3217 3632,3217 3992,3577 3992,3716 4078,3716 4078,3513 3575,3010 2611.33,3010
VCC on Bottom Layer "VCC_L02_P057" (solid, pour order 57): 2992,4577.03 2991,4578.03 2991,4731.03 2996,4736.03 3202,4736.03 3203,4736.03 3207,4732.03 3208,4731.03 3208,4577.03
GND on Bottom Layer "GND_L02_P039" (solid, pour order 39): 2459.54,4449.46 2660,4249 2660,3010 980,3010 980,4074 1352,4074 1727.46,4449.46

## Silkscreen, mask and mechanical layers (free items; w line width, h text height)
Top Overlay:
  text "V_BAT" at 1390,4968 h35
  text "5V" at 1732,4965 h35
  text "GND_TP" at 1196,4746 h40
  text "5V" at 1357,4559 h35
  text "V_BAT" at 1355,4457 h35
  text "H3" at 3455,4281 h60
  text "H1" at 4040,4278.03 h60
  text "GND" at 1355,4260 h35
  text "VREG" at 2513,4237 h40
  text "GND" at 3402,4109 h60
  text "H2" at 4039,4109 h60
  text "Va" at 3456,3948 h60
  text "Vhall" at 4038,3942 h60
  text "Vb" at 3454,3790 h60
  text "Vc" at 4034,3774.03 h60
  text "AGND" at 1845,3652 h40
  text "VBB" at 2388,3649 h40
  text "CSP" at 2128,3585 h40
  text "DIR" at 1771.2,3564 h40
  text "CSN" at 2128,3531 h40
  text "PWM" at 1772,3432 h40
  text "CS" at 1770.8,3303 h40
  text "H1" at 2685,3180 h40
  text "H2" at 2685,3123 h40
  text "H3" at 2685,3070 h40
Bottom Overlay:
  lines w10: 1338,4145 1338,4305 ; 1338,4345 1338,4503 ; 1338,4542 1338,4603
  text "5V" at 1412,4556 h35
  text "V_BAT" at 1516,4459 h35
  text "GND" at 1449,4258 h35
  text "ESF" at 1149,3956 h35
  text "DIRO" at 1450,3955 h35
  text "COAST" at 1148,3856 h35
  text "RESET" at 1489,3855 h35
  text "FF2" at 1146,3756 h35
  text "FF1" at 1410,3755 h35
  text "BRAKE" at 1489,3658 h35
  text "TACHO" at 1152,3657 h35
  text "DIR" at 1143,3558 h35
  text "PWM" at 1425,3557 h35
  text "MODE" at 1142,3458 h35
  text "CSOUT" at 1496,3455 h35
  text "UBC Thunderbots / MotorDriver R03/2.2 / Simon Zheng" at 3799,3084 h40
Mechanical 1:
  lines w10: 975,3010 ccw(c980,3010) 980,3005 ; 975,3010 ccw(c980,3010) 980,3005 ; 975,3010 975,5020 ; 975,5020 cw(c980,5020) 980,5025 ; 975,5020 cw(c980,5020) 980,5025 ; 980,3005 4290,3005 ; 980,5025 4290,5025 ; 4290,3005 ccw(c4290,3010) 4295,3010 ; 4290,3005 ccw(c4290,3010) 4295,3010 ; 4290,5025 cw(c4290,5020) 4295,5020 ; 4290,5025 cw(c4290,5020) 4295,5020 ; 4295,3010 4295,5020

## Dimensions
980,3005 to 4295,3010 on Top Layer